# EAGLE board untitled (EAGLE 9.4.2)
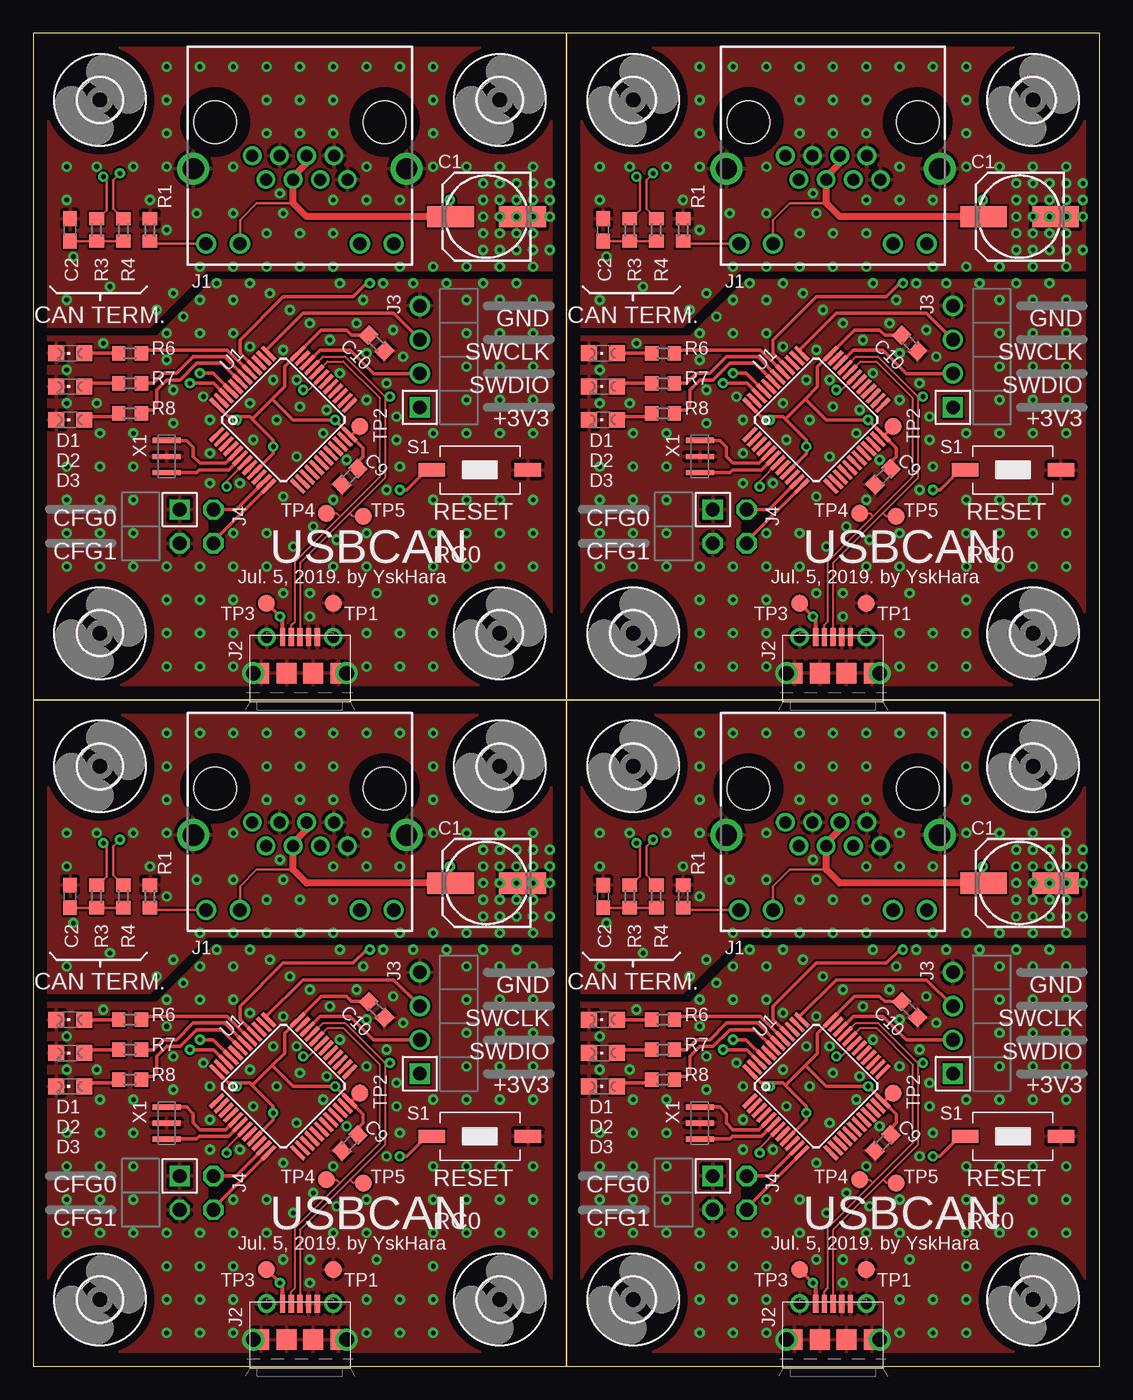
[diagram p0: board, top side]
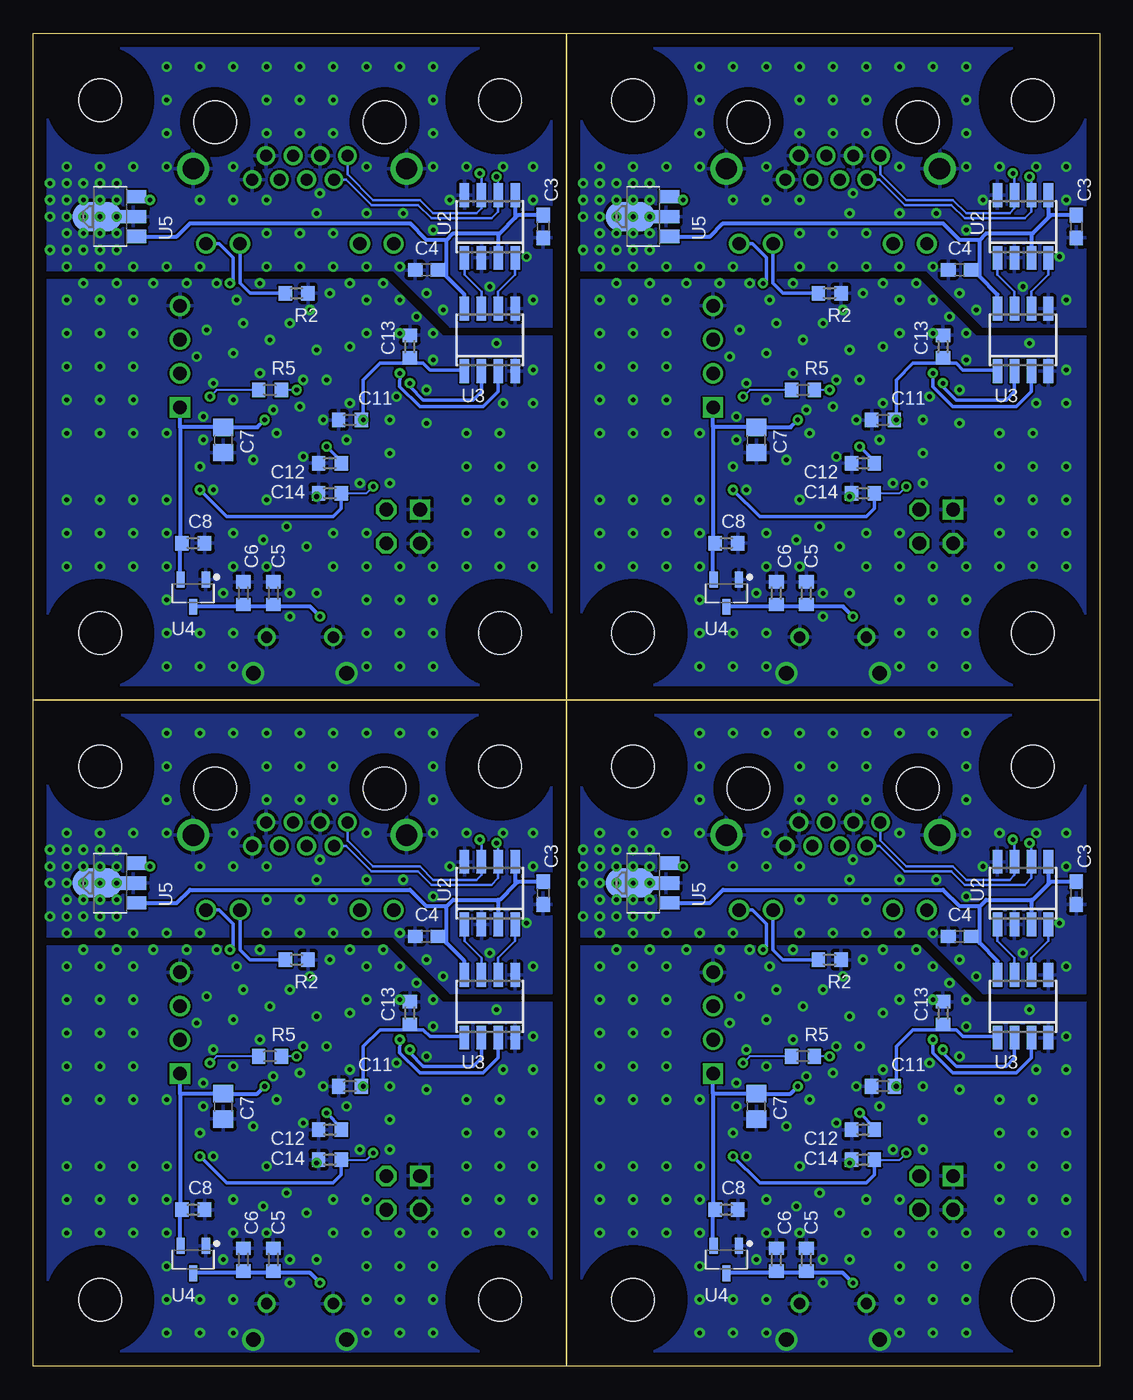
[diagram p1: board, bottom side, seen from below]

Size 80 x 100 mm. Coordinates in mm from the lower left corner, seen from the top.
Outline: 40,0 0,0 0,50
Outline: 40,0 40,50
Outline: 40,50 0,50
Outline: 40,0 80,0 80,50
Outline: 80,50 40,50
Outline: 40,50 40,0
Outline: 0,50 40,50
Outline: 40,50 40,100
Outline: 40,100 0,100 0,50
Outline: 40,50 80,50
Outline: 80,50 80,100 40,100
Outline: 40,100 40,50
Copper layers (1*16): Top 0.035mm / dielectric 1.5mm / Bottom 0.035mm
Design rules "default": minimum track width 6mil, minimum drill 0.35mm, track to track 6mil, track to pad 6mil, pad to pad 6mil, via to via 6mil, smd to smd 6mil, copper to edge 40mil, drill to drill 6mil, minimum pad ring 10mil, minimum via ring 8mil, stop-mask expansion 4mil, vias tented up to drill 0mil, thermal gap 10mil
tKeepout: 48 lines
bKeepout: 48 lines
tRestrict: area 14.2,24.2 to 14.6,24.5; area 54.2,24.2 to 54.6,24.5; area 14.2,74.2 to 14.6,74.5; area 54.2,74.2 to 54.6,74.5; 8 lines
bRestrict: 4 lines

## Footprints (pad centres in the part's own frame; a part is rotated, then mirrored left to right if it is on the bottom)
153CLV-0605 = smd 3.5 x 1.6: + 2.7,0; - -2.7,0
C0603 = smd 1.1 x 1: 1 -0.85,0; 2 0.85,0
C0603' = smd 1 x 1.1: 1 -0.85,0; 2 0.85,0
C0805 = smd 1.3 x 1.5: 1 -0.95,0; 2 0.95,0
CHIPLED_0805 = smd 1.2 x 1.2: A 0,-1.05; C 0,1.05
3,2 = hole 3.2: 0,0
8P8C-LED = drill 0.9 pad 1.3: 1 3.57,-3.81; 2 2.55,-2.03; 3 1.53,-3.81; 4 0.51,-2.03; 5 -0.51,-3.81; 6 -1.53,-2.03; 7 -2.55,-3.81; 8 -3.57,-2.03 | drill 1 pad 1.422: GA 4.5,2.78; GC 7.04,2.78; YA -7.04,2.78; YC -4.5,2.78 | drill 1.6 pad 2.184: M1 -8,-2.85; M2 8,-2.85 | hole 3.2: 6.35,-6.35; -6.35,-6.35
47589-0001 = smd 1.35 x 0.4: 1 2.7,1.3; 2 2.7,0.65; 3 2.7,0; 4 2.7,-0.65; 5 2.7,-1.3 | drill 1.1 pad 1.6: CASING1 0,3.5; CASING2 0,-3.5 | drill 0.85 pad 1.25: CASING3 2.7,2.5; CASING4 2.7,-2.5 | smd 1.55 x 1.2: P$1 0,2.9; P$4 0,-2.9 | smd 1.55 x 1.5: P$2 0,1; P$3 0,-1
MA04-1 = drill 1.016 square: 1 3.81,0 | drill 1.016: 2 1.27,0; 3 -1.27,0; 4 -3.81,0
MA02-2W = drill 1.016 octagon: 1 -1.27,-1.27; 2 -1.27,1.27; 3 1.27,-1.27 | drill 1.016 square: 4 1.27,1.27
R0603 = smd 1 x 1.1: 1 -0.85,0; 2 0.85,0
SWITCH_TACTILE_3X6 = smd 2 x 1: P$1 -3.6,0; P$2 3.6,0
B1,27 = smd 1.27 x 1.27: TP 0,0
LQFP48 = smd 1.4 x 0.3: 1 -4.3,2.75; 2 -4.3,2.25; 3 -4.3,1.75; 4 -4.3,1.25; 5 -4.3,0.75; 6 -4.3,0.25; 7 -4.3,-0.25; 8 -4.3,-0.75; 9 -4.3,-1.25; 10 -4.3,-1.75; 11 -4.3,-2.25; 12 -4.3,-2.75; 25 4.3,-2.75; 26 4.3,-2.25; 27 4.3,-1.75; 28 4.3,-1.25; 29 4.3,-0.75; 30 4.3,-0.25; 31 4.3,0.25; 32 4.3,0.75; 33 4.3,1.25; 34 4.3,1.75; 35 4.3,2.25; 36 4.3,2.75 | smd 0.3 x 1.4: 13 -2.75,-4.3; 14 -2.25,-4.3; 15 -1.75,-4.3; 16 -1.25,-4.3; 17 -0.75,-4.3; 18 -0.25,-4.3; 19 0.25,-4.3; 20 0.75,-4.3; 21 1.25,-4.3; 22 1.75,-4.3; 23 2.25,-4.3; 24 2.75,-4.3; 37 2.75,4.3; 38 2.25,4.3; 39 1.75,4.3; 40 1.25,4.3; 41 0.75,4.3; 42 0.25,4.3; 43 -0.25,4.3; 44 -0.75,4.3; 45 -1.25,4.3; 46 -1.75,4.3; 47 -2.25,4.3; 48 -2.75,4.3
SO08 = smd 0.72 x 1.78: 1 -1.905,-2.35; 2 -0.635,-2.35; 3 0.635,-2.35; 4 1.905,-2.35; 5 1.905,2.35; 6 0.635,2.35; 7 -0.635,2.35; 8 -1.905,2.35
SOT95P240X110-3 = smd 1.18 x 0.609: 1 -1.024,0.95; 2 -1.024,-0.95; 3 1.024,0
SOT89 = smd 1 x 1.5: 1 -1.499,-1.981; 3 1.499,-1.981 | smd 1 x 2: 2 0,-1.727 | smd 2.2 x 3.7: 2@1 0,0.94
CSTCE8M00G55 = smd 0.4 x 2.1: 1 -1.2,0; 2 0,0; 3 1.2,0

## Placement (x,y rotation side)
C1  EEEHA1E220P  [153CLV-0605]  34,36.25 180 top
C2  [C0603]  2.75,35.25 90 top
C3  [C0603]  1.75,35.5 270 bottom
C4  [C0603]  10.5,32.25 180 bottom
C5  1u  [C0603']  22,8 90 bottom
C6  100n  [C0603']  24.25,8 90 bottom
C7  4u7  [C0805]  25.75,19.5 270 bottom
C8  100n  [C0603']  28,11.75 0 bottom
C9  100n  [C0603']  23.75,16.75 45 top
C10  100n  [C0603']  25.75,26.75 135 top
C11  100n  [C0603']  16.25,21 0 bottom
C12  100n  [C0603']  17.75,17.75 0 bottom
C13  100n  [C0603']  11.75,26.5 270 bottom
C14  100n  [C0603']  17.75,15.5 0 bottom
C15  [C0603]  41.75,35.5 270 bottom
C16  EEEHA1E220P  [153CLV-0605]  74,36.25 180 top
C17  [C0603]  50.5,32.25 180 bottom
C18  100n  [C0603']  64.25,8 90 bottom
C19  100n  [C0603']  68,11.75 0 bottom
C20  4u7  [C0805]  65.75,19.5 270 bottom
C21  100n  [C0603']  63.75,16.75 45 top
C22  100n  [C0603']  65.75,26.75 135 top
C23  100n  [C0603']  56.25,21 0 bottom
C24  100n  [C0603']  57.75,15.5 0 bottom
C25  1u  [C0603']  62,8 90 bottom
C26  100n  [C0603']  57.75,17.75 0 bottom
C27  [C0603]  42.75,35.25 90 top
C28  100n  [C0603']  51.75,26.5 270 bottom
C29  [C0603]  1.75,85.5 270 bottom
C30  EEEHA1E220P  [153CLV-0605]  34,86.25 180 top
C31  [C0603]  10.5,82.25 180 bottom
C32  100n  [C0603']  24.25,58 90 bottom
C33  100n  [C0603']  28,61.75 0 bottom
C34  4u7  [C0805]  25.75,69.5 270 bottom
C35  100n  [C0603']  23.75,66.75 45 top
C36  100n  [C0603']  25.75,76.75 135 top
C37  100n  [C0603']  16.25,71 0 bottom
C38  100n  [C0603']  17.75,65.5 0 bottom
C39  1u  [C0603']  22,58 90 bottom
C40  100n  [C0603']  17.75,67.75 0 bottom
C41  [C0603]  2.75,85.25 90 top
C42  100n  [C0603']  11.75,76.5 270 bottom
C43  [C0603]  41.75,85.5 270 bottom
C44  EEEHA1E220P  [153CLV-0605]  74,86.25 180 top
C45  [C0603]  50.5,82.25 180 bottom
C46  100n  [C0603']  64.25,58 90 bottom
C47  100n  [C0603']  68,61.75 0 bottom
C48  4u7  [C0805]  65.75,69.5 270 bottom
C49  100n  [C0603']  63.75,66.75 45 top
C50  100n  [C0603']  65.75,76.75 135 top
C51  100n  [C0603']  56.25,71 0 bottom
C52  100n  [C0603']  57.75,65.5 0 bottom
C53  1u  [C0603']  62,58 90 bottom
C54  100n  [C0603']  57.75,67.75 0 bottom
C55  [C0603]  42.75,85.25 90 top
C56  100n  [C0603']  51.75,76.5 270 bottom
D1  [CHIPLED_0805]  2.75,26 90 top
D2  [CHIPLED_0805]  2.75,23.5 90 top
D3  [CHIPLED_0805]  2.75,21 90 top
D4  [CHIPLED_0805]  42.75,26 90 top
D5  [CHIPLED_0805]  42.75,23.5 90 top
D6  [CHIPLED_0805]  42.75,21 90 top
D7  [CHIPLED_0805]  2.75,76 90 top
D8  [CHIPLED_0805]  2.75,73.5 90 top
D9  [CHIPLED_0805]  2.75,71 90 top
D10  [CHIPLED_0805]  42.75,76 90 top
D11  [CHIPLED_0805]  42.75,73.5 90 top
D12  [CHIPLED_0805]  42.75,71 90 top
H1  MOUNT-HOLE3.2  [3,2]  5,5 0 top
H2  MOUNT-HOLE3.2  [3,2]  35,5 0 top
H3  MOUNT-HOLE3.2  [3,2]  5,45 0 top
H4  MOUNT-HOLE3.2  [3,2]  35,45 0 top
H5  MOUNT-HOLE3.2  [3,2]  75,45 0 top
H6  MOUNT-HOLE3.2  [3,2]  75,5 0 top
H7  MOUNT-HOLE3.2  [3,2]  45,45 0 top
H8  MOUNT-HOLE3.2  [3,2]  45,5 0 top
H9  MOUNT-HOLE3.2  [3,2]  35,95 0 top
H10  MOUNT-HOLE3.2  [3,2]  35,55 0 top
H11  MOUNT-HOLE3.2  [3,2]  5,95 0 top
H12  MOUNT-HOLE3.2  [3,2]  5,55 0 top
H13  MOUNT-HOLE3.2  [3,2]  75,95 0 top
H14  MOUNT-HOLE3.2  [3,2]  75,55 0 top
H15  MOUNT-HOLE3.2  [3,2]  45,95 0 top
H16  MOUNT-HOLE3.2  [3,2]  45,55 0 top
J1  8P8C-LED  [8P8C-LED]  20,37 180 top
J2  MICRO-USB-RECEPTACLE47589-0001  [47589-0001]  20,2 90 top
J3  MA04-1  [MA04-1]  29,25.75 270 top
J4  MA02-2  [MA02-2W]  12.25,13 90 top
J5  8P8C-LED  [8P8C-LED]  60,37 180 top
J6  MICRO-USB-RECEPTACLE47589-0001  [47589-0001]  60,2 90 top
J7  MA02-2  [MA02-2W]  52.25,13 90 top
J8  MA04-1  [MA04-1]  69,25.75 270 top
J9  8P8C-LED  [8P8C-LED]  20,87 180 top
J10  MICRO-USB-RECEPTACLE47589-0001  [47589-0001]  20,52 90 top
J11  MA02-2  [MA02-2W]  12.25,63 90 top
J12  MA04-1  [MA04-1]  29,75.75 270 top
J13  8P8C-LED  [8P8C-LED]  60,87 180 top
J14  MICRO-USB-RECEPTACLE47589-0001  [47589-0001]  60,52 90 top
J15  MA02-2  [MA02-2W]  52.25,63 90 top
J16  MA04-1  [MA04-1]  69,75.75 270 top
R1  [R0603]  8.75,35.25 270 top
R2  [R0603]  20.25,30.5 180 bottom
R3  60  [R0603]  4.75,35.25 270 top
R4  60  [R0603]  6.75,35.25 270 top
R5  1k5  [R0603]  22.25,23.25 180 bottom
R6  1k  [R0603]  7.25,26 180 top
R7  1k  [R0603]  7.25,23.75 180 top
R8  1k  [R0603]  7.25,21.5 180 top
R9  [R0603]  48.75,35.25 270 top
R10  [R0603]  60.25,30.5 180 bottom
R11  60  [R0603]  46.75,35.25 270 top
R12  1k  [R0603]  47.25,26 180 top
R13  1k  [R0603]  47.25,23.75 180 top
R14  1k  [R0603]  47.25,21.5 180 top
R15  60  [R0603]  44.75,35.25 270 top
R16  1k5  [R0603]  62.25,23.25 180 bottom
R17  [R0603]  8.75,85.25 270 top
R18  [R0603]  20.25,80.5 180 bottom
R19  60  [R0603]  6.75,85.25 270 top
R20  1k  [R0603]  7.25,76 180 top
R21  1k  [R0603]  7.25,73.75 180 top
R22  1k  [R0603]  7.25,71.5 180 top
R23  60  [R0603]  4.75,85.25 270 top
R24  1k5  [R0603]  22.25,73.25 180 bottom
R25  [R0603]  48.75,85.25 270 top
R26  [R0603]  60.25,80.5 180 bottom
R27  60  [R0603]  46.75,85.25 270 top
R28  1k  [R0603]  47.25,76 180 top
R29  1k  [R0603]  47.25,73.75 180 top
R30  1k  [R0603]  47.25,71.5 180 top
R31  60  [R0603]  44.75,85.25 270 top
R32  1k5  [R0603]  62.25,73.25 180 bottom
S1  SWITCH_TACTILETOP  [SWITCH_TACTILE_3X6]  33.5,17.25 180 top
S2  SWITCH_TACTILETOP  [SWITCH_TACTILE_3X6]  73.5,17.25 180 top
S3  SWITCH_TACTILETOP  [SWITCH_TACTILE_3X6]  33.5,67.25 180 top
S4  SWITCH_TACTILETOP  [SWITCH_TACTILE_3X6]  73.5,67.25 180 top
TP1  TPB1,27  [B1,27]  22.5,7.25 0 top
TP2  TPB1,27  [B1,27]  24.5,20.5 0 top
TP3  TPB1,27  [B1,27]  17.5,7.25 0 top
TP4  TPB1,27  [B1,27]  22,14 0 top
TP5  TPB1,27  [B1,27]  24.75,13.75 0 top
TP6  TPB1,27  [B1,27]  62.5,7.25 0 top
TP7  TPB1,27  [B1,27]  64.5,20.5 0 top
TP8  TPB1,27  [B1,27]  57.5,7.25 0 top
TP9  TPB1,27  [B1,27]  62,14 0 top
TP10  TPB1,27  [B1,27]  64.75,13.75 0 top
TP11  TPB1,27  [B1,27]  22.5,57.25 0 top
TP12  TPB1,27  [B1,27]  24.5,70.5 0 top
TP13  TPB1,27  [B1,27]  17.5,57.25 0 top
TP14  TPB1,27  [B1,27]  22,64 0 top
TP15  TPB1,27  [B1,27]  24.75,63.75 0 top
TP16  TPB1,27  [B1,27]  62.5,57.25 0 top
TP17  TPB1,27  [B1,27]  64.5,70.5 0 top
TP18  TPB1,27  [B1,27]  57.5,57.25 0 top
TP19  TPB1,27  [B1,27]  62,64 0 top
TP20  TPB1,27  [B1,27]  64.75,63.75 0 top
U1  STM32F302C  [LQFP48]  18.75,21 45 top
U2  NCV7351D1E  [SO08]  5.75,35.5 0 bottom
U3  SI8621AB-B-IS  [SO08]  5.75,27 0 bottom
U4  AP2127N-3.3TRG1  [SOT95P240X110-3]  28,8 270 bottom
U5  78L05F  [SOT89]  34.25,36.25 90 bottom
U6  NCV7351D1E  [SO08]  45.75,35.5 0 bottom
U7  STM32F302C  [LQFP48]  58.75,21 45 top
U8  SI8621AB-B-IS  [SO08]  45.75,27 0 bottom
U9  AP2127N-3.3TRG1  [SOT95P240X110-3]  68,8 270 bottom
U10  78L05F  [SOT89]  74.25,36.25 90 bottom
U11  NCV7351D1E  [SO08]  5.75,85.5 0 bottom
U12  STM32F302C  [LQFP48]  18.75,71 45 top
U13  SI8621AB-B-IS  [SO08]  5.75,77 0 bottom
U14  AP2127N-3.3TRG1  [SOT95P240X110-3]  28,58 270 bottom
U15  78L05F  [SOT89]  34.25,86.25 90 bottom
U16  NCV7351D1E  [SO08]  45.75,85.5 0 bottom
U17  STM32F302C  [LQFP48]  58.75,71 45 top
U18  SI8621AB-B-IS  [SO08]  45.75,77 0 bottom
U19  AP2127N-3.3TRG1  [SOT95P240X110-3]  68,58 270 bottom
U20  78L05F  [SOT89]  74.25,86.25 90 bottom
X1  CSTCE8M00G55  [CSTCE8M00G55]  10,18.25 270 top
X2  CSTCE8M00G55  [CSTCE8M00G55]  50,18.25 270 top
X3  CSTCE8M00G55  [CSTCE8M00G55]  10,68.25 270 top
X4  CSTCE8M00G55  [CSTCE8M00G55]  50,68.25 270 top

## Library data of the parts
C1-C4 C15-C17 C27 C29-C31 C41 C43-C45 C55 = rcl; SPICEPREFIX: C
C5-C14 C18-C26 C28 C32-C40 C42 C46-C54 C56 R5-R8 R12-R14 R16 R20-R22 R24 R28-R30 R32 = rcl
D1-D12 = led
H1-H16 = holes
J1 J5 J9 J13 = con-rj45; OC_FARNELL: unknown; OC_NEWARK: unknown
J2 J6 J10 J14 = con-molex-usb
J3 J4 J7 J8 J11 J12 J15 J16 = con-headers
R1-R4 R9-R11 R15 R17-R19 R23 R25-R27 R31 = rcl; SPICEPREFIX: R
S1-S4 = switch-tactile
TP1-TP20 = testpad
U1 U7 U12 U17 = stm32_mcu
U2 U6 U11 U16 = on-semi
U3 U8 U13 U18 = silabs
U4 U9 U14 U19 = torex
U5 U10 U15 U20 = linear
X1-X4 = resonator

## Nets
!RESET: C14.2 S1.P$2 U1.7
!RESET1: C24.2 S2.P$2 U7.7
!RESET2: C38.2 S3.P$2 U12.7
!RESET3: C52.2 S4.P$2 U17.7
+3V1: C19.1 C20.1 C21.2 C22.2 C23.2 C26.2 C28.2 J8.1 TP7.TP U7.9 U7.24 U7.36 U7.48 U8.1 U9.2
+3V2: C33.1 C34.1 C35.2 C36.2 C37.2 C40.2 C42.2 J12.1 TP12.TP U12.9 U12.24 U12.36 U12.48 U13.1 U14.2
+3V3: C7.1 C8.1 C9.2 C10.2 C11.2 C12.2 C13.2 J3.1 TP2.TP U1.9 U1.24 U1.36 U1.48 U3.1 U4.2
+3V4: C47.1 C48.1 C49.2 C50.2 C51.2 C54.2 C56.2 J16.1 TP17.TP U17.9 U17.24 U17.36 U17.48 U18.1 U19.2
+5V: C5.1 C6.1 J2.1 TP3.TP U4.3
+5V1: C18.1 C25.1 J6.1 TP8.TP U9.3
+5V2: C32.1 C39.1 J10.1 TP13.TP U14.3
+5V3: C46.1 C53.1 J14.1 TP18.TP U19.3
+5V_ISO: C3.1 C4.1 U2.3 U2.5 U3.8 U5.1
+5V_ISO1: C15.1 C17.1 U6.3 U6.5 U8.8 U10.1
+5V_ISO2: C29.1 C31.1 U11.3 U11.5 U13.8 U15.1
+5V_ISO3: C43.1 C45.1 U16.3 U16.5 U18.8 U20.1
+12V: C1.+ J1.4 J1.5 J1.GA U5.3
+12V1: C16.+ J5.4 J5.5 J5.GA U10.3
+12V2: C30.+ J9.4 J9.5 J9.GA U15.3
+12V3: C44.+ J13.4 J13.5 J13.GA U20.3
CAN_LED: J1.YA U1.40
CAN_LED1: J5.YA U7.40
CAN_LED2: J9.YA U12.40
CAN_LED3: J13.YA U17.40
CANH: J1.1 R4.1 U2.7
CANH1: J5.1 R11.1 U6.7
CANH2: J9.1 R19.1 U11.7
CANH3: J13.1 R27.1 U16.7
CANL: J1.2 R3.1 U2.6
CANL1: J5.2 R15.1 U6.6
CANL2: J9.2 R23.1 U11.6
CANL3: J13.2 R31.1 U16.6
CANRX: U1.45 U3.3
CANRX1: U7.45 U8.3
CANRX2: U12.45 U13.3
CANRX3: U17.45 U18.3
CANRX_ISO: U2.4 U3.6
CANRX_ISO1: U6.4 U8.6
CANRX_ISO2: U11.4 U13.6
CANRX_ISO3: U16.4 U18.6
CANTX: U1.46 U3.2
CANTX1: U7.46 U8.2
CANTX2: U12.46 U13.2
CANTX3: U17.46 U18.2
CANTX_ISO: U2.1 U3.7
CANTX_ISO1: U6.1 U8.7
CANTX_ISO2: U11.1 U13.7
CANTX_ISO3: U16.1 U18.7
CONF0: J4.3 U1.11
CONF1: J4.1 U1.12
CONF2: J7.3 U7.11
CONF3: J7.1 U7.12
CONF4: J11.3 U12.11
CONF5: J11.1 U12.12
CONF6: J15.3 U17.11
CONF7: J15.1 U17.12
GNDA: C5.2 C6.2 C7.2 C8.2 C9.1 C10.1 C11.1 C12.1 C13.1 C14.1 D1.C D2.C D3.C J2.4 J2.5 J2.CASING1 J2.CASING2 J2.CASING3 J2.CASING4 J2.P$1 J2.P$2 J2.P$3 J2.P$4 J3.4 J4.2 J4.4 R2.1 S1.P$1 TP1.TP U1.8 U1.23 U1.35 U1.44 U1.47 U3.4 U4.1 X1.2
GNDA1: C18.2 C19.2 C20.2 C21.1 C22.1 C23.1 C24.1 C25.2 C26.1 C28.1 D4.C D5.C D6.C J6.4 J6.5 J6.CASING1 J6.CASING2 J6.CASING3 J6.CASING4 J6.P$1 J6.P$2 J6.P$3 J6.P$4 J7.2 J7.4 J8.4 R10.1 S2.P$1 TP6.TP U7.8 U7.23 U7.35 U7.44 U7.47 U8.4 U9.1 X2.2
GNDA2: C32.2 C33.2 C34.2 C35.1 C36.1 C37.1 C38.1 C39.2 C40.1 C42.1 D7.C D8.C D9.C J10.4 J10.5 J10.CASING1 J10.CASING2 J10.CASING3 J10.CASING4 J10.P$1 J10.P$2 J10.P$3 J10.P$4 J11.2 J11.4 J12.4 R18.1 S3.P$1 TP11.TP U12.8 U12.23 U12.35 U12.44 U12.47 U13.4 U14.1 X3.2
GNDA3: C46.2 C47.2 C48.2 C49.1 C50.1 C51.1 C52.1 C53.2 C54.1 C56.1 D10.C D11.C D12.C J14.4 J14.5 J14.CASING1 J14.CASING2 J14.CASING3 J14.CASING4 J14.P$1 J14.P$2 J14.P$3 J14.P$4 J15.2 J15.4 J16.4 R26.1 S4.P$1 TP16.TP U17.8 U17.23 U17.35 U17.44 U17.47 U18.4 U19.1 X4.2
GNDIO: C1.- C2.2 C3.2 C4.2 J1.3 J1.7 J1.8 J1.M1 J1.M2 R1.1 U2.2 U2.8 U3.5 U5.2 U5.2@1
GNDIO1: C15.2 C16.- C17.2 C27.2 J5.3 J5.7 J5.8 J5.M1 J5.M2 R9.1 U6.2 U6.8 U8.5 U10.2 U10.2@1
GNDIO2: C29.2 C30.- C31.2 C41.2 J9.3 J9.7 J9.8 J9.M1 J9.M2 R17.1 U11.2 U11.8 U13.5 U15.2 U15.2@1
GNDIO3: C43.2 C44.- C45.2 C55.2 J13.3 J13.7 J13.8 J13.M1 J13.M2 R25.1 U16.2 U16.8 U18.5 U20.2 U20.2@1
LED0: R6.1 U1.41
LED1: R7.1 U1.42
LED2: R8.1 U1.43
LED3: R14.1 U7.43
LED4: R12.1 U7.41
LED5: R13.1 U7.42
LED6: R22.1 U12.43
LED7: R20.1 U12.41
LED8: R21.1 U12.42
LED9: R30.1 U17.43
LED10: R28.1 U17.41
LED11: R29.1 U17.42
N$1: J5.GC R9.2
N$2: D2.A R7.2
N$3: J1.GC R1.2
N$4: J1.YC R2.2
N$5: D1.A R6.2
N$6: C2.1 R3.2 R4.2
N$7: U1.6 X1.3
N$8: U1.5 X1.1
N$9: J5.YC R10.2
N$10: U7.6 X2.3
N$11: R5.1 U1.31
N$12: U7.5 X2.1
N$13: R16.1 U7.31
N$14: C27.1 R11.2 R15.2
N$15: D5.A R13.2
N$16: D4.A R12.2
N$17: D6.A R14.2
N$18: J9.GC R17.2
N$19: J9.YC R18.2
N$20: U12.6 X3.3
N$21: D3.A R8.2
N$22: U12.5 X3.1
N$23: R24.1 U12.31
N$24: C41.1 R19.2 R23.2
N$25: D8.A R21.2
N$26: D7.A R20.2
N$27: D9.A R22.2
N$28: J13.GC R25.2
N$29: J13.YC R26.2
N$30: U17.6 X4.3
N$31: U17.5 X4.1
N$32: R32.1 U17.31
N$33: C55.1 R27.2 R31.2
N$34: D11.A R29.2
N$35: D10.A R28.2
N$36: D12.A R30.2
SWCLK: J3.3 U1.37
SWCLK1: J8.3 U7.37
SWCLK2: J12.3 U12.37
SWCLK3: J16.3 U17.37
SWDIO: J3.2 U1.34
SWDIO1: J8.2 U7.34
SWDIO2: J12.2 U12.34
SWDIO3: J16.2 U17.34
USB_DM: J2.2 TP4.TP U1.32
USB_DM1: J6.2 TP9.TP U7.32
USB_DM2: J10.2 TP14.TP U12.32
USB_DM3: J14.2 TP19.TP U17.32
USB_DP: J2.3 R5.2 TP5.TP U1.33
USB_DP1: J6.3 R16.2 TP10.TP U7.33
USB_DP2: J10.3 R24.2 TP15.TP U12.33
USB_DP3: J14.3 R32.2 TP20.TP U17.33

## Tracks (layer width: path | path; a pad name or v marks a point on that pad's centre or on a via)
!RESET  (via drill 0.35)
  Top 0.152: v14.5,16 14.5,16.4 U1.7
  Top 0.254: S1.P$2 29.5,17.25 28,15.75 v27.5,15.75
  Bottom 0.152: C14.2 15,15.5 v14.5,16
  Bottom 0.254: v27.5,15.75 25.5,13.75 17.5,13.75 16.9,14.35 C14.2
!RESET1  (via drill 0.35)
  Top 0.152: v54.5,16 54.5,16.4 U7.7
  Top 0.254: S2.P$2 69.5,17.25 68,15.75 v67.5,15.75
  Bottom 0.152: C24.2 55,15.5 v54.5,16
  Bottom 0.254: v67.5,15.75 65.5,13.75 57.5,13.75 56.9,14.35 C24.2
!RESET2  (via drill 0.35)
  Top 0.152: v14.5,66 14.5,66.4 U12.7
  Top 0.254: S3.P$2 29.5,67.25 28,65.75 v27.5,65.75
  Bottom 0.152: C38.2 15,65.5 v14.5,66
  Bottom 0.254: v27.5,65.75 25.5,63.75 17.5,63.75 16.9,64.35 C38.2
!RESET3  (via drill 0.35)
  Top 0.152: v54.5,66 54.5,66.4 U17.7
  Top 0.254: S4.P$2 69.5,67.25 68,65.75 v67.5,65.75
  Bottom 0.152: C52.2 55,65.5 v54.5,66
  Bottom 0.254: v67.5,65.75 65.5,63.75 57.5,63.75 56.9,64.35 C52.2
+3V1  (via drill 0.35)
  Top 0.152: 63.9,19.9 U7.24
  Top 0.254: C22.2 63.9,27.35 63.5,27.75 61.61,27.75 U7.36 58.85,24.98 58.85,23.48 57.93,22.57 | 57.93,22.57 56.43,21.07 | U7.48 54.61,21.25 55,21.25 | 55.11,21.25 56.25,21.25 56.43,21.07 | 55.11,21.25 55,21.25 | U7.9 58,18.48 v58,19 58,19.5 56.43,21.07 | 57.93,22.57 59.5,21 v62.64,21 U7.24 64.75,18.89 64.75,18.25 64.35,17.85 C21.2 | 55.11,21.25 55.11,21.14 v55.25,21 55,21.25 | TP7.TP 63.9,19.9
  Bottom 0.254: C26.2 56.9,17.9 v58,19 | 51.75,25.25 50.75,25.25 50.25,24.75 47.76,24.75 U8.1 | 51.75,25.25 54,25.25 55.25,24 v55.25,21 | C28.2 51.75,25.25
  Bottom 0.305: v62.64,21 63.19,20.45 C20.1 69,20.45 | 69,20.45 J8.1 | 69,20.45 69,11.75 | U9.2 69,9.02 69,11.75 | C19.1 69,11.75 | C23.2 v55.25,21
+3V2  (via drill 0.35)
  Top 0.152: 23.9,69.9 U12.24
  Top 0.254: C36.2 23.9,77.35 23.5,77.75 21.61,77.75 U12.36 18.85,74.98 18.85,73.48 17.93,72.57 | 17.93,72.57 16.43,71.07 | U12.48 14.61,71.25 15,71.25 | 15.11,71.25 16.25,71.25 16.43,71.07 | 15.11,71.25 15,71.25 | U12.9 18,68.48 v18,69 18,69.5 16.43,71.07 | 17.93,72.57 19.5,71 v22.64,71 U12.24 24.75,68.89 24.75,68.25 24.35,67.85 C35.2 | 15.11,71.25 15.11,71.14 v15.25,71 15,71.25 | TP12.TP 23.9,69.9
  Bottom 0.254: C40.2 16.9,67.9 v18,69 | 11.75,75.25 10.75,75.25 10.25,74.75 7.75,74.75 U13.1 | 11.75,75.25 14,75.25 15.25,74 v15.25,71 | C42.2 11.75,75.25
  Bottom 0.305: v22.64,71 23.19,70.45 C34.1 29,70.45 | 29,70.45 J12.1 | 29,70.45 29,61.75 | U14.2 29,59.02 29,61.75 | C33.1 29,61.75 | C37.2 v15.25,71
+3V3  (via drill 0.35)
  Top 0.152: 23.9,19.9 U1.24
  Top 0.254: C10.2 23.9,27.35 23.5,27.75 21.61,27.75 U1.36 18.85,24.98 18.85,23.48 17.93,22.57 | 17.93,22.57 16.43,21.07 | U1.48 14.61,21.25 15,21.25 | 15.11,21.25 16.25,21.25 16.43,21.07 | 15.11,21.25 15,21.25 | U1.9 18,18.48 v18,19 18,19.5 16.43,21.07 | 17.93,22.57 19.5,21 v22.64,21 U1.24 24.75,18.89 24.75,18.25 24.35,17.85 C9.2 | 15.11,21.25 15.11,21.14 v15.25,21 15,21.25 | TP2.TP 23.9,19.9
  Bottom 0.254: C12.2 16.9,17.9 v18,19 | 11.75,25.25 10.75,25.25 10.25,24.75 7.75,24.75 U3.1 | 11.75,25.25 14,25.25 15.25,24 v15.25,21 | C13.2 11.75,25.25
  Bottom 0.305: v22.64,21 23.19,20.45 C7.1 29,20.45 | 29,20.45 J3.1 | 29,20.45 29,11.75 | U4.2 29,9.02 29,11.75 | C8.1 29,11.75 | C11.2 v15.25,21
+3V4  (via drill 0.35)
  Top 0.152: 63.9,69.9 U17.24
  Top 0.254: C50.2 63.9,77.35 63.5,77.75 61.61,77.75 U17.36 58.85,74.98 58.85,73.48 57.93,72.57 | 57.93,72.57 56.43,71.07 | U17.48 54.61,71.25 55,71.25 | 55.11,71.25 56.25,71.25 56.43,71.07 | 55.11,71.25 55,71.25 | U17.9 58,68.48 v58,69 58,69.5 56.43,71.07 | 57.93,72.57 59.5,71 v62.64,71 U17.24 64.75,68.89 64.75,68.25 64.35,67.85 C49.2 | 55.11,71.25 55.11,71.14 v55.25,71 55,71.25 | TP17.TP 63.9,69.9
  Bottom 0.254: C54.2 56.9,67.9 v58,69 | 51.75,75.25 50.75,75.25 50.25,74.75 47.76,74.75 U18.1 | 51.75,75.25 54,75.25 55.25,74 v55.25,71 | C56.2 51.75,75.25
  Bottom 0.305: v62.64,71 63.19,70.45 C48.1 69,70.45 | 69,70.45 J16.1 | 69,70.45 69,61.75 | U19.2 69,59.02 69,61.75 | C47.1 69,61.75 | C51.2 v55.25,71
+5V  (via drill 0.35)
  Top 0.254: TP3.TP v18.5,6.25
  Top 0.305: J2.1 18.7,6.05 v18.5,6.25
  Bottom 0.305: v18.5,6.25 19.25,7 22,7 | 22,7 24.25,7 | C5.1 22,7 | C6.1 24.25,7 | U4.3 28,7 24.25,7
+5V1  (via drill 0.35)
  Top 0.254: TP8.TP v58.5,6.25
  Top 0.305: J6.1 58.7,6.05 v58.5,6.25
  Bottom 0.305: v58.5,6.25 59.25,7 62,7 | 62,7 64.25,7 | C25.1 62,7 | C18.1 64.25,7 | U9.3 68,7 64.25,7
+5V2  (via drill 0.35)
  Top 0.254: TP13.TP v18.5,56.25
  Top 0.305: J10.1 18.7,56.05 v18.5,56.25
  Bottom 0.305: v18.5,56.25 19.25,57 22,57 | 22,57 24.25,57 | C39.1 22,57 | C32.1 24.25,57 | U14.3 28,57 24.25,57
+5V3  (via drill 0.35)
  Top 0.254: TP18.TP v58.5,56.25
  Top 0.305: J14.1 58.7,56.05 v58.5,56.25
  Bottom 0.305: v58.5,56.25 59.25,57 62,57 | 62,57 64.25,57 | C53.1 62,57 | C46.1 64.25,57 | U19.3 68,57 64.25,57
+5V_ISO
  Bottom 0.305: U2.5 3.85,36.16 | 5.12,35 U2.3 | 3.85,36.16 5,35 5.12,35 | U3.8 7.66,30.41 9,31.75 9,32.25 | 9,34.5 10.5,34.5 11.75,35.75 28.25,35.75 29.25,34.75 U5.1 | 9,32.25 9,34.5 | 9,34.5 8.5,35 5.12,35 | C4.1 9,32.25 | C3.1 3.65,36.35 3.85,36.16
+5V_ISO1
  Bottom 0.305: U6.5 43.84,36.16 | 45.12,35 U6.3 | 43.84,36.16 45,35 45.12,35 | U8.8 47.66,30.41 49,31.75 49,32.25 | 49,34.5 50.5,34.5 51.75,35.75 68.25,35.75 69.25,34.75 U10.1 | 49,32.25 49,34.5 | 49,34.5 48.5,35 45.12,35 | C17.1 49,32.25 | C15.1 43.65,36.35 43.84,36.16
+5V_ISO2
  Bottom 0.305: U11.5 3.85,86.16 | 5.12,85 U11.3 | 3.85,86.16 5,85 5.12,85 | U13.8 7.66,80.41 9,81.75 9,82.25 | 9,84.5 10.5,84.5 11.75,85.75 28.25,85.75 29.25,84.75 U15.1 | 9,82.25 9,84.5 | 9,84.5 8.5,85 5.12,85 | C31.1 9,82.25 | C29.1 3.65,86.35 3.85,86.16
+5V_ISO3
  Bottom 0.305: U16.5 43.84,86.16 | 45.12,85 U16.3 | 43.84,86.16 45,85 45.12,85 | U18.8 47.66,80.41 49,81.75 49,82.25 | 49,84.5 50.5,84.5 51.75,85.75 68.25,85.75 69.25,84.75 U20.1 | 49,82.25 49,84.5 | 49,84.5 48.5,85 45.12,85 | C45.1 49,82.25 | C43.1 43.65,86.35 43.84,86.16
+12V  (via drill 0.35)
  Top 0.2: J1.GA 15.5,36 16.76,37.26 19.49,37.26
  Top 0.305: v31.25,37.5 31.25,36.3 C1.+
  Top 0.508: C1.+ 20.5,36.25 19.49,37.26 J1.4 19.49,39.24 20.51,40.26 J1.5
  Bottom 0.305: U5.3 32.02,37.5 v31.25,37.5
+12V1  (via drill 0.35)
  Top 0.2: J5.GA 55.5,36 56.76,37.26 59.49,37.26
  Top 0.305: v71.25,37.5 71.25,36.3 C16.+
  Top 0.508: C16.+ 60.5,36.25 59.49,37.26 J5.4 59.49,39.24 60.51,40.26 J5.5
  Bottom 0.305: U10.3 72.02,37.5 v71.25,37.5
+12V2  (via drill 0.35)
  Top 0.2: J9.GA 15.5,86 16.76,87.26 19.49,87.26
  Top 0.305: v31.25,87.5 31.25,86.3 C30.+
  Top 0.508: C30.+ 20.5,86.25 19.49,87.26 J9.4 19.49,89.24 20.51,90.26 J9.5
  Bottom 0.305: U15.3 32.02,87.5 v31.25,87.5
+12V3  (via drill 0.35)
  Top 0.2: J13.GA 55.5,86 56.76,87.26 59.49,87.26
  Top 0.305: v71.25,87.5 71.25,86.3 C44.+
  Top 0.508: C44.+ 60.5,86.25 59.49,87.26 J13.4 59.49,89.24 60.51,90.26 J13.5
  Bottom 0.305: U20.3 72.02,87.5 v71.25,87.5
CAN_LED  (via drill 0.35)
  Top 0.254: U1.40 15.5,26.02 15.5,27 18.75,30.25 24,30.25 25,31.25 v25.25,31.25
  Bottom 0.254: J1.YA 26.04,34.22 25,33.18 25,31.5 v25.25,31.25
CAN_LED1  (via drill 0.35)
  Top 0.254: U7.40 55.5,26.02 55.5,27 58.75,30.25 64,30.25 65,31.25 v65.25,31.25
  Bottom 0.254: J5.YA 66.04,34.22 65,33.18 65,31.5 v65.25,31.25
CAN_LED2  (via drill 0.35)
  Top 0.254: U12.40 15.5,76.02 15.5,77 18.75,80.25 24,80.25 25,81.25 v25.25,81.25
  Bottom 0.254: J9.YA 26.04,84.22 25,83.18 25,81.5 v25.25,81.25
CAN_LED3  (via drill 0.35)
  Top 0.254: U17.40 55.5,76.02 55.5,77 58.75,80.25 64,80.25 65,81.25 v65.25,81.25
  Bottom 0.254: J13.YA 66.04,84.22 65,83.18 65,81.5 v65.25,81.25
CANH  (via drill 0.35)
  Top 0.2: v6.5,39.5 6,39 6,36.85 R4.1
  Bottom 0.2: J1.1 16.43,39.43 14.5,37.5 11,37.5 10,36.5 6.75,36.5 6.38,36.87 U2.7 6.38,39.38 v6.5,39.5
CANH1  (via drill 0.35)
  Top 0.2: v46.5,39.5 46,39 46,36.85 R11.1
  Bottom 0.2: J5.1 56.43,39.43 54.5,37.5 51,37.5 50,36.5 46.75,36.5 46.38,36.87 U6.7 46.38,39.38 v46.5,39.5
CANH2  (via drill 0.35)
  Top 0.2: v6.5,89.5 6,89 6,86.85 R19.1
  Bottom 0.2: J9.1 16.43,89.43 14.5,87.5 11,87.5 10,86.5 6.75,86.5 6.38,86.86 U11.7 6.38,89.39 v6.5,89.5
CANH3  (via drill 0.35)
  Top 0.2: v46.5,89.5 46,89 46,86.85 R27.1
  Bottom 0.2: J13.1 56.43,89.43 54.5,87.5 51,87.5 50,86.5 46.75,86.5 46.38,86.86 U16.7 46.38,89.39 v46.5,89.5
CANL  (via drill 0.35)
  Top 0.2: R3.1 4.85,36.1 5.5,36.75 5.5,39 v5.25,39.25
  Bottom 0.2: J1.2 16.53,39.03 14.62,37.12 11.12,37.12 10.12,36.12 5.62,36.12 5.12,36.63 U2.6 5.12,39.12 v5.25,39.25
CANL1  (via drill 0.35)
  Top 0.2: R15.1 44.85,36.1 45.5,36.75 45.5,39 v45.25,39.25
  Bottom 0.2: J5.2 56.53,39.03 54.62,37.12 51.12,37.12 50.12,36.12 45.62,36.12 45.12,36.63 U6.6 45.12,39.12 v45.25,39.25
CANL2  (via drill 0.35)
  Top 0.2: R23.1 4.85,86.1 5.5,86.75 5.5,89 v5.25,89.25
  Bottom 0.2: J9.2 16.53,89.03 14.62,87.12 11.12,87.12 10.12,86.12 5.62,86.12 5.12,86.64 U11.6 5.12,89.11 v5.25,89.25
CANL3  (via drill 0.35)
  Top 0.2: R31.1 44.85,86.1 45.5,86.75 45.5,89 v45.25,89.25
  Bottom 0.2: J13.2 56.53,89.03 54.62,87.12 51.12,87.12 50.12,86.12 45.62,86.12 45.12,86.64 U16.6 45.12,89.11 v45.25,89.25
CANRX  (via drill 0.35)
  Top 0.254: v12.5,24.5 13.48,24.5 U1.45
  Bottom 0.254: U3.3 5.12,23.14 6.25,22 11,22 12.5,23.5 v12.5,24.5
CANRX1  (via drill 0.35)
  Top 0.254: v52.5,24.5 53.48,24.5 U7.45
  Bottom 0.254: U8.3 45.12,23.14 46.25,22 51,22 52.5,23.5 v52.5,24.5
CANRX2  (via drill 0.35)
  Top 0.254: v12.5,74.5 13.48,74.5 U12.45
  Bottom 0.254: U13.3 5.12,73.14 6.25,72 11,72 12.5,73.5 v12.5,74.5
CANRX3  (via drill 0.35)
  Top 0.254: v52.5,74.5 53.48,74.5 U17.45
  Bottom 0.254: U18.3 45.12,73.14 46.25,72 51,72 52.5,73.5 v52.5,74.5
CANRX_ISO
  Bottom 0.2: U2.4 3.85,31.91 5.12,30.64 U3.6
CANRX_ISO1
  Bottom 0.2: U6.4 43.84,31.91 45.12,30.64 U8.6
CANRX_ISO2
  Bottom 0.2: U11.4 3.85,81.91 5.12,80.64 U13.6
CANRX_ISO3
  Bottom 0.2: U16.4 43.84,81.91 45.12,80.64 U18.6
CANTX  (via drill 0.35)
  Top 0.254: v11.75,23.75 13.53,23.75 U1.46
  Bottom 0.254: U3.2 6.38,23.11 7,22.5 10.75,22.5 11.75,23.5 v11.75,23.75
CANTX1  (via drill 0.35)
  Top 0.254: v51.75,23.75 53.52,23.75 U7.46
  Bottom 0.254: U8.2 46.38,23.11 47,22.5 50.75,22.5 51.75,23.5 v51.75,23.75
CANTX2  (via drill 0.35)
  Top 0.254: v11.75,73.75 13.53,73.75 U12.46
  Bottom 0.254: U13.2 6.38,73.11 7,72.5 10.75,72.5 11.75,73.5 v11.75,73.75
CANTX3  (via drill 0.35)
  Top 0.254: v51.75,73.75 53.52,73.75 U17.46
  Bottom 0.254: U18.2 46.38,73.11 47,72.5 50.75,72.5 51.75,73.5 v51.75,73.75
CANTX_ISO
  Bottom 0.2: U3.7 6.38,30.64 7.66,31.91 U2.1
CANTX_ISO1
  Bottom 0.2: U8.7 46.38,30.64 47.66,31.91 U6.1
CANTX_ISO2
  Bottom 0.2: U13.7 6.38,80.64 7.66,81.91 U11.1
CANTX_ISO3
  Bottom 0.2: U18.7 46.38,80.64 47.66,81.91 U16.1
CONF0
  Top 0.254: J4.3 15.2,14.27 U1.11
CONF1
  Top 0.254: J4.1 13.5,11.75 13.5,11.86 U1.12
CONF2
  Top 0.254: J7.3 55.2,14.27 U7.11
CONF3
  Top 0.254: J7.1 53.5,11.75 53.5,11.86 U7.12
CONF4
  Top 0.254: J11.3 15.2,64.27 U12.11
CONF5
  Top 0.254: J11.1 13.5,61.75 13.5,61.86 U12.12
CONF6
  Top 0.254: J15.3 55.2,64.27 U17.11
CONF7
  Top 0.254: J15.1 53.5,61.75 53.5,61.86 U17.12
GNDA  (via drill 0.35)
  other vias: 23,24.5 22.25,27 27.75,25.75 23.5,18 15.5,16.25 10,25.5 12.75,22.75 5,17.5 2.5,17.5 2.5,15 5,15 7.5,20 7.5,17.5 13.25,18.5 7.5,15 15,30 19.25,29.25 20.75,28.25 16.25,26.5 12.5,30 10,27.5 15,12.5 17.5,12.5 25,12.5 22.5,15 18.75,15.25 18.25,21 20,22 13.25,16.25 30,15 32.5,15 35,15 37.5,15 37.5,20 35,20 32.5,20 30,20 27.5,17.5 26.5,23.75 25,22.5 24.75,30 26.25,31.25 32.5,30 32.5,27.5 32.5,25 32.5,22.5 35,22.5 37.5,22.5 37.5,25 35,25 35,27.5 37.5,27.5 37.5,30 35,30 30,12.5 32.5,12.5 35,12.5 37.5,12.5 37.5,10 35,10 32.5,10 30,10 30,7.5 30,5 27.5,5 27.5,2.5 30,2.5 25,2.5 25,5 15,7.5 15,5 15,2.5 12.5,2.5 12.5,5 12.5,7.5 10,7.5 10,5 10,2.5 10,10 12.5,10 15,10 17.5,10 7.5,10 5,10 2.5,10 2.5,12.5 5,12.5 7.5,12.5 24.25,28.25 23,31.25 18.75,26.25 16.25,22.25 18,24 16.5,19.5 10.5,20.75 10.5,23.25 4.75,22.25 2.5,24.75 5.25,26.75 2.5,22.25 13.25,21 26.5,15.75 25,10 22.5,10 22.75,12 20.75,6.25 20.75,8 18.75,8 19.5,11.5 21,13 27.25,19.5 27.25,21.25 22,21.75 21.75,20 19.75,18.25 16.25,31.25 17.75,30.5 13.75,31.25 11.25,28.75 15,27.5 33.75,31.25 36.25,31.25 31,31.25 28.5,31.25 25,26 27,27.75 12.5,27.5 19.75,24 5,20 25.75,8
  pour Bottom (rank 6): 0.25,27.25 0.25,0.25 39.75,0.25 39.75,31.5 13.5,31.5 9.25,27.25
  pour Top (rank 6): 0.25,27.25 0.25,0.25 39.75,0.25 39.75,31.5 13.5,31.5 9.25,27.25
GNDA1  (via drill 0.35)
  other vias: 63,24.5 62.25,27 67.75,25.75 63.5,18 55.5,16.25 50,25.5 52.75,22.75 45,17.5 42.5,17.5 42.5,15 45,15 47.5,20 47.5,17.5 53.25,18.5 47.5,15 55,30 59.25,29.25 60.75,28.25 56.25,26.5 52.5,30 50,27.5 55,12.5 57.5,12.5 65,12.5 62.5,15 58.75,15.25 58.25,21 60,22 53.25,16.25 70,15 72.5,15 75,15 77.5,15 77.5,20 75,20 72.5,20 70,20 67.5,17.5 66.5,23.75 65,22.5 64.75,30 66.25,31.25 72.5,30 72.5,27.5 72.5,25 72.5,22.5 75,22.5 77.5,22.5 77.5,25 75,25 75,27.5 77.5,27.5 77.5,30 75,30 70,12.5 72.5,12.5 75,12.5 77.5,12.5 77.5,10 75,10 72.5,10 70,10 70,7.5 70,5 67.5,5 67.5,2.5 70,2.5 65,2.5 65,5 55,7.5 55,5 55,2.5 52.5,2.5 52.5,5 52.5,7.5 50,7.5 50,5 50,2.5 50,10 52.5,10 55,10 57.5,10 47.5,10 45,10 42.5,10 42.5,12.5 45,12.5 47.5,12.5 64.25,28.25 63,31.25 58.75,26.25 56.25,22.25 58,24 56.5,19.5 50.5,20.75 50.5,23.25 44.75,22.25 42.5,24.75 45.25,26.75 42.5,22.25 53.25,21 66.5,15.75 65,10 62.5,10 62.75,12 60.75,6.25 60.75,8 58.75,8 59.5,11.5 61,13 67.25,19.5 67.25,21.25 62,21.75 61.75,20 59.75,18.25 56.25,31.25 57.75,30.5 53.75,31.25 51.25,28.75 55,27.5 73.75,31.25 76.25,31.25 71,31.25 68.5,31.25 65,26 67,27.75 52.5,27.5 59.75,24 45,20 65.75,8
  pour Bottom (rank 6): 40.25,27.25 40.25,0.25 79.75,0.25 79.75,31.5 53.5,31.5 49.25,27.25
  pour Top (rank 6): 40.25,27.25 40.25,0.25 79.75,0.25 79.75,31.5 53.5,31.5 49.25,27.25
GNDA2  (via drill 0.35)
  other vias: 23,74.5 22.25,77 27.75,75.75 23.5,68 15.5,66.25 10,75.5 12.75,72.75 5,67.5 2.5,67.5 2.5,65 5,65 7.5,70 7.5,67.5 13.25,68.5 7.5,65 15,80 19.25,79.25 20.75,78.25 16.25,76.5 12.5,80 10,77.5 15,62.5 17.5,62.5 25,62.5 22.5,65 18.75,65.25 18.25,71 20,72 13.25,66.25 30,65 32.5,65 35,65 37.5,65 37.5,70 35,70 32.5,70 30,70 27.5,67.5 26.5,73.75 25,72.5 24.75,80 26.25,81.25 32.5,80 32.5,77.5 32.5,75 32.5,72.5 35,72.5 37.5,72.5 37.5,75 35,75 35,77.5 37.5,77.5 37.5,80 35,80 30,62.5 32.5,62.5 35,62.5 37.5,62.5 37.5,60 35,60 32.5,60 30,60 30,57.5 30,55 27.5,55 27.5,52.5 30,52.5 25,52.5 25,55 15,57.5 15,55 15,52.5 12.5,52.5 12.5,55 12.5,57.5 10,57.5 10,55 10,52.5 10,60 12.5,60 15,60 17.5,60 7.5,60 5,60 2.5,60 2.5,62.5 5,62.5 7.5,62.5 24.25,78.25 23,81.25 18.75,76.25 16.25,72.25 18,74 16.5,69.5 10.5,70.75 10.5,73.25 4.75,72.25 2.5,74.75 5.25,76.75 2.5,72.25 13.25,71 26.5,65.75 25,60 22.5,60 22.75,62 20.75,56.25 20.75,58 18.75,58 19.5,61.5 21,63 27.25,69.5 27.25,71.25 22,71.75 21.75,70 19.75,68.25 16.25,81.25 17.75,80.5 13.75,81.25 11.25,78.75 15,77.5 33.75,81.25 36.25,81.25 31,81.25 28.5,81.25 25,76 27,77.75 12.5,77.5 19.75,74 5,70 25.75,58
  pour Bottom (rank 6): 0.25,77.25 0.25,50.25 39.75,50.25 39.75,81.5 13.5,81.5 9.25,77.25
  pour Top (rank 6): 0.25,77.25 0.25,50.25 39.75,50.25 39.75,81.5 13.5,81.5 9.25,77.25
GNDA3  (via drill 0.35)
  other vias: 63,74.5 62.25,77 67.75,75.75 63.5,68 55.5,66.25 50,75.5 52.75,72.75 45,67.5 42.5,67.5 42.5,65 45,65 47.5,70 47.5,67.5 53.25,68.5 47.5,65 55,80 59.25,79.25 60.75,78.25 56.25,76.5 52.5,80 50,77.5 55,62.5 57.5,62.5 65,62.5 62.5,65 58.75,65.25 58.25,71 60,72 53.25,66.25 70,65 72.5,65 75,65 77.5,65 77.5,70 75,70 72.5,70 70,70 67.5,67.5 66.5,73.75 65,72.5 64.75,80 66.25,81.25 72.5,80 72.5,77.5 72.5,75 72.5,72.5 75,72.5 77.5,72.5 77.5,75 75,75 75,77.5 77.5,77.5 77.5,80 75,80 70,62.5 72.5,62.5 75,62.5 77.5,62.5 77.5,60 75,60 72.5,60 70,60 70,57.5 70,55 67.5,55 67.5,52.5 70,52.5 65,52.5 65,55 55,57.5 55,55 55,52.5 52.5,52.5 52.5,55 52.5,57.5 50,57.5 50,55 50,52.5 50,60 52.5,60 55,60 57.5,60 47.5,60 45,60 42.5,60 42.5,62.5 45,62.5 47.5,62.5 64.25,78.25 63,81.25 58.75,76.25 56.25,72.25 58,74 56.5,69.5 50.5,70.75 50.5,73.25 44.75,72.25 42.5,74.75 45.25,76.75 42.5,72.25 53.25,71 66.5,65.75 65,60 62.5,60 62.75,62 60.75,56.25 60.75,58 58.75,58 59.5,61.5 61,63 67.25,69.5 67.25,71.25 62,71.75 61.75,70 59.75,68.25 56.25,81.25 57.75,80.5 53.75,81.25 51.25,78.75 55,77.5 73.75,81.25 76.25,81.25 71,81.25 68.5,81.25 65,76 67,77.75 52.5,77.5 59.75,74 45,70 65.75,58
  pour Bottom (rank 6): 40.25,77.25 40.25,50.25 79.75,50.25 79.75,81.5 53.5,81.5 49.25,77.25
  pour Top (rank 6): 40.25,77.25 40.25,50.25 79.75,50.25 79.75,81.5 53.5,81.5 49.25,77.25
GNDIO  (via drill 0.35)
  other vias: 10,42.5 10,40 7.5,40 2.5,40 4.75,40 2.5,37.5 3,33.25 2.5,30 10.5,30.5 12.5,32.5 15,32.5 17.5,32.5 20,32.5 22.5,32.5 20,35 17.5,35 22.5,35 27.5,32.5 30,32.5 32.5,32.5 35,32.5 37.5,32.5 37.5,40 35,40 32.5,40 30,40 30,42.5 30,45 30,47.5 27.5,47.5 25,47.5 22.5,47.5 22.5,45 22.5,42.5 25,40 25,37.5 27.5,37.5 22.5,37.5 20,42.5 20,45 20,47.5 17.5,47.5 17.5,45 17.5,42.5 15,47.5 12.5,47.5 10,47.5 10,45 15,40 18.75,36.5 15,36.5 12.25,36.5 10,35.25 18.5,38 8.75,37.5 5.75,31 9.25,29.25 33.75,33.75 36.25,33.75 38.75,33.75 37.5,35 37.5,37.5 38.75,38.75 36.25,38.75 35,37.5 33.75,36.25 36.25,36.25 33.75,38.75 33.75,35 36.25,35 35,35 35,36.25 37.5,36.25 38.75,36.25 38.75,37.5 36.25,37.5 37.5,38.75 35,38.75 33.75,37.5 35,33.75 37.5,33.75
  pour Top: 0.25,49.75 0.25,28 8.75,28 13,32.25 39.75,32.25 39.75,49.75
  pour Bottom: 0.25,49.75 0.25,28 8.75,28 13,32.25 39.75,32.25 39.75,49.75
GNDIO1  (via drill 0.35)
  other vias: 50,42.5 50,40 47.5,40 42.5,40 44.75,40 42.5,37.5 43,33.25 42.5,30 50.5,30.5 52.5,32.5 55,32.5 57.5,32.5 60,32.5 62.5,32.5 60,35 57.5,35 62.5,35 67.5,32.5 70,32.5 72.5,32.5 75,32.5 77.5,32.5 77.5,40 75,40 72.5,40 70,40 70,42.5 70,45 70,47.5 67.5,47.5 65,47.5 62.5,47.5 62.5,45 62.5,42.5 65,40 65,37.5 67.5,37.5 62.5,37.5 60,42.5 60,45 60,47.5 57.5,47.5 57.5,45 57.5,42.5 55,47.5 52.5,47.5 50,47.5 50,45 55,40 58.75,36.5 55,36.5 52.25,36.5 50,35.25 58.5,38 48.75,37.5 45.75,31 49.25,29.25 73.75,33.75 76.25,33.75 78.75,33.75 77.5,35 77.5,37.5 78.75,38.75 76.25,38.75 75,37.5 73.75,36.25 76.25,36.25 73.75,38.75 73.75,35 76.25,35 75,35 75,36.25 77.5,36.25 78.75,36.25 78.75,37.5 76.25,37.5 77.5,38.75 75,38.75 73.75,37.5 75,33.75 77.5,33.75
  pour Top: 40.25,49.75 40.25,28 48.75,28 53,32.25 79.75,32.25 79.75,49.75
  pour Bottom: 40.25,49.75 40.25,28 48.75,28 53,32.25 79.75,32.25 79.75,49.75
GNDIO2  (via drill 0.35)
  other vias: 10,92.5 10,90 7.5,90 2.5,90 4.75,90 2.5,87.5 3,83.25 2.5,80 10.5,80.5 12.5,82.5 15,82.5 17.5,82.5 20,82.5 22.5,82.5 20,85 17.5,85 22.5,85 27.5,82.5 30,82.5 32.5,82.5 35,82.5 37.5,82.5 37.5,90 35,90 32.5,90 30,90 30,92.5 30,95 30,97.5 27.5,97.5 25,97.5 22.5,97.5 22.5,95 22.5,92.5 25,90 25,87.5 27.5,87.5 22.5,87.5 20,92.5 20,95 20,97.5 17.5,97.5 17.5,95 17.5,92.5 15,97.5 12.5,97.5 10,97.5 10,95 15,90 18.75,86.5 15,86.5 12.25,86.5 10,85.25 18.5,88 8.75,87.5 5.75,81 9.25,79.25 33.75,83.75 36.25,83.75 38.75,83.75 37.5,85 37.5,87.5 38.75,88.75 36.25,88.75 35,87.5 33.75,86.25 36.25,86.25 33.75,88.75 33.75,85 36.25,85 35,85 35,86.25 37.5,86.25 38.75,86.25 38.75,87.5 36.25,87.5 37.5,88.75 35,88.75 33.75,87.5 35,83.75 37.5,83.75
  pour Top: 0.25,99.75 0.25,78 8.75,78 13,82.25 39.75,82.25 39.75,99.75
  pour Bottom: 0.25,99.75 0.25,78 8.75,78 13,82.25 39.75,82.25 39.75,99.75
GNDIO3  (via drill 0.35)
  other vias: 50,92.5 50,90 47.5,90 42.5,90 44.75,90 42.5,87.5 43,83.25 42.5,80 50.5,80.5 52.5,82.5 55,82.5 57.5,82.5 60,82.5 62.5,82.5 60,85 57.5,85 62.5,85 67.5,82.5 70,82.5 72.5,82.5 75,82.5 77.5,82.5 77.5,90 75,90 72.5,90 70,90 70,92.5 70,95 70,97.5 67.5,97.5 65,97.5 62.5,97.5 62.5,95 62.5,92.5 65,90 65,87.5 67.5,87.5 62.5,87.5 60,92.5 60,95 60,97.5 57.5,97.5 57.5,95 57.5,92.5 55,97.5 52.5,97.5 50,97.5 50,95 55,90 58.75,86.5 55,86.5 52.25,86.5 50,85.25 58.5,88 48.75,87.5 45.75,81 49.25,79.25 73.75,83.75 76.25,83.75 78.75,83.75 77.5,85 77.5,87.5 78.75,88.75 76.25,88.75 75,87.5 73.75,86.25 76.25,86.25 73.75,88.75 73.75,85 76.25,85 75,85 75,86.25 77.5,86.25 78.75,86.25 78.75,87.5 76.25,87.5 77.5,88.75 75,88.75 73.75,87.5 75,83.75 77.5,83.75
  pour Top: 40.25,99.75 40.25,78 48.75,78 53,82.25 79.75,82.25 79.75,99.75
  pour Bottom: 40.25,99.75 40.25,78 48.75,78 53,82.25 79.75,82.25 79.75,99.75
LED0
  Top 0.254: U1.41 14.56,26.25 8.35,26.25 R6.1
LED1
  Top 0.254: U1.42 14.35,25.75 12,25.75 10.75,24.5 9.75,24.5 9,23.75 R7.1
LED2
  Top 0.254: U1.43 14.15,25.25 12.25,25.25 11,24 10,24 9.25,23.25 9.25,22 9,21.75 8.35,21.75 R8.1
LED3
  Top 0.254: U7.43 54.15,25.25 52.25,25.25 51,24 50,24 49.25,23.25 49.25,22 49,21.75 48.35,21.75 R14.1
LED4
  Top 0.254: U7.41 54.56,26.25 48.35,26.25 R12.1
LED5
  Top 0.254: U7.42 54.35,25.75 52,25.75 50.75,24.5 49.75,24.5 49,23.75 R13.1
LED6
  Top 0.254: U12.43 14.15,75.25 12.25,75.25 11,74 10,74 9.25,73.25 9.25,72 9,71.75 8.35,71.75 R22.1
LED7
  Top 0.254: U12.41 14.56,76.25 8.35,76.25 R20.1
LED8
  Top 0.254: U12.42 14.35,75.75 12,75.75 10.75,74.5 9.75,74.5 9,73.75 R21.1
LED9
  Top 0.254: U17.43 54.15,75.25 52.25,75.25 51,74 50,74 49.25,73.25 49.25,72 49,71.75 48.35,71.75 R30.1
LED10
  Top 0.254: U17.41 54.56,76.25 48.35,76.25 R28.1
LED11
  Top 0.254: U17.42 54.35,75.75 52,75.75 50.75,74.5 49.75,74.5 49,73.75 R29.1
N$1
  Top 0.2: J5.GC 48.93,34.22 R9.2
N$2
  Top 0.254: R7.2 4.05,23.75 D2.A
N$3
  Top 0.2: J1.GC 8.93,34.22 R1.2
N$4
  Bottom 0.254: R2.2 23.75,30.5 24.5,31.25 J1.YC
N$5
  Top 0.254: R6.2 D1.A
N$6
  Top 0.2: R4.2 R3.2 C2.1
N$7
  Top 0.254: U1.6 14.65,17.25 12.45,17.25 12.25,17.05 X1.3
N$8
  Top 0.254: U1.5 14.44,17.75 12.5,17.75 12,18.25 12,18.95 11.5,19.45 X1.1
N$9
  Bottom 0.254: R10.2 63.75,30.5 64.5,31.25 J5.YC
N$10
  Top 0.254: U7.6 54.65,17.25 52.45,17.25 52.25,17.05 X2.3
N$11  (via drill 0.35)
  Top 0.152: U1.31 20.65,23.25 v20.25,23.25
  Bottom 0.152: v20.25,23.25 R5.1
N$12
  Top 0.254: U7.5 54.44,17.75 52.5,17.75 52,18.25 52,18.95 51.5,19.45 X2.1
N$13  (via drill 0.35)
  Top 0.152: U7.31 60.65,23.25 v60.25,23.25
  Bottom 0.152: v60.25,23.25 R16.1
N$14
  Top 0.2: R11.2 R15.2 C27.1
N$15
  Top 0.254: R13.2 44.05,23.75 D5.A
N$16
  Top 0.254: R12.2 D4.A
N$17
  Top 0.254: D6.A 44.05,21.25 46.15,21.25 R14.2
N$18
  Top 0.2: J9.GC 8.93,84.22 R17.2
N$19
  Bottom 0.254: R18.2 23.75,80.5 24.5,81.25 J9.YC
N$20
  Top 0.254: U12.6 14.65,67.25 12.45,67.25 12.25,67.05 X3.3
N$21
  Top 0.254: D3.A 4.05,21.25 6.15,21.25 R8.2
N$22
  Top 0.254: U12.5 14.44,67.75 12.5,67.75 12,68.25 12,68.95 11.5,69.45 X3.1
N$23  (via drill 0.35)
  Top 0.152: U12.31 20.65,73.25 v20.25,73.25
  Bottom 0.152: v20.25,73.25 R24.1
N$24
  Top 0.2: R19.2 R23.2 C41.1
N$25
  Top 0.254: R21.2 4.05,73.75 D8.A
N$26
  Top 0.254: R20.2 D7.A
N$27
  Top 0.254: D9.A 4.05,71.25 6.15,71.25 R22.2
N$28
  Top 0.2: J13.GC 48.93,84.22 R25.2
N$29
  Bottom 0.254: R26.2 63.75,80.5 64.5,81.25 J13.YC
N$30
  Top 0.254: U17.6 54.65,67.25 52.45,67.25 52.25,67.05 X4.3
N$31
  Top 0.254: U17.5 54.44,67.75 52.5,67.75 52,68.25 52,68.95 51.5,69.45 X4.1
N$32  (via drill 0.35)
  Top 0.152: U17.31 60.65,73.25 v60.25,73.25
  Bottom 0.152: v60.25,73.25 R32.1
N$33
  Top 0.2: R27.2 R31.2 C55.1
N$34
  Top 0.254: R29.2 44.05,73.75 D11.A
N$35
  Top 0.254: R28.2 D10.A
N$36
  Top 0.254: D12.A 44.05,71.25 46.15,71.25 R30.2
SWCLK
  Top 0.254: 17.45,26.2 | 17.45,26.2 U1.37 | 17.45,26.2 20.25,29 27.02,29 J3.3
SWCLK1
  Top 0.254: 57.45,26.2 | 57.45,26.2 U7.37 | 57.45,26.2 60.25,29 67.02,29 J8.3
SWCLK2
  Top 0.254: 17.45,76.19 | 17.45,76.19 U12.37 | 17.45,76.19 20.25,79 27.02,79 J12.3
SWCLK3
  Top 0.254: 57.45,76.19 | 57.45,76.19 U17.37 | 57.45,76.19 60.25,79 67.02,79 J16.3
SWDIO
  Top 0.254: U1.34 21.52,26.25 23.75,26.25 25.52,24.48 J3.2
SWDIO1
  Top 0.254: U7.34 61.52,26.25 63.75,26.25 65.52,24.48 J8.2
SWDIO2
  Top 0.254: U12.34 21.52,76.25 23.75,76.25 25.52,74.48 J12.2
SWDIO3
  Top 0.254: U17.34 61.52,76.25 63.75,76.25 65.52,74.48 J16.2
USB_DM
  Top 0.152: U1.32 22.06,25.38 23.25,25.38 26,22.62 26,16.75 23,13.75 | J2.2 19.35,5.6 19.62,5.88 19.62,10.38 23,13.75 | TP4.TP 22.75,14 23,13.75
USB_DM1
  Top 0.152: U7.32 62.06,25.38 63.25,25.38 66,22.62 66,16.75 63,13.75 | J6.2 59.35,5.6 59.62,5.88 59.62,10.38 63,13.75 | TP9.TP 62.75,14 63,13.75
USB_DM2
  Top 0.152: U12.32 22.06,75.38 23.25,75.38 26,72.62 26,66.75 23,63.75 | J10.2 19.35,55.6 19.62,55.88 19.62,60.38 23,63.75 | TP14.TP 22.75,64 23,63.75
USB_DM3
  Top 0.152: U17.32 62.06,75.38 63.25,75.38 66,72.62 66,66.75 63,63.75 | J14.2 59.35,55.6 59.62,55.88 59.62,60.38 63,63.75 | TP19.TP 62.75,64 63,63.75
USB_DP  (via drill 0.35)
  Top 0.152: U1.33 21.73,25.75 23.38,25.75 26.38,22.75 | 26.38,22.75 26.38,16.62 23.75,14 | 23.75,14 20,10.25 J2.3 | 26.38,22.75 v26.75,22.75 | TP5.TP 24,13.75 23.75,14
  Bottom 0.152: R5.2 26.25,23.25 v26.75,22.75
USB_DP1  (via drill 0.35)
  Top 0.152: U7.33 61.73,25.75 63.38,25.75 66.38,22.75 | 66.38,22.75 66.38,16.62 63.75,14 | 63.75,14 60,10.25 J6.3 | 66.38,22.75 v66.75,22.75 | TP10.TP 64,13.75 63.75,14
  Bottom 0.152: R16.2 66.25,23.25 v66.75,22.75
USB_DP2  (via drill 0.35)
  Top 0.152: U12.33 21.73,75.75 23.38,75.75 26.38,72.75 | 26.38,72.75 26.38,66.62 23.75,64 | 23.75,64 20,60.25 J10.3 | 26.38,72.75 v26.75,72.75 | TP15.TP 24,63.75 23.75,64
  Bottom 0.152: R24.2 26.25,73.25 v26.75,72.75
USB_DP3  (via drill 0.35)
  Top 0.152: U17.33 61.73,75.75 63.38,75.75 66.38,72.75 | 66.38,72.75 66.38,66.62 63.75,64 | 63.75,64 60,60.25 J14.3 | 66.38,72.75 v66.75,72.75 | TP20.TP 64,63.75 63.75,64
  Bottom 0.152: R32.2 66.25,73.25 v66.75,72.75

## Text on the board
tPlace: CAN TERM. | CAN TERM. | GND | GND | SWCLK | SWCLK | SWDIO | SWDIO | +3V3 | +3V3 | RESET | RESET | CFG0 | CFG0 | CFG1 | USBCAN | RC0 | Jul. 5, 2019. by YskHara | CFG1 | USBCAN | RC0 | Jul. 5, 2019. by YskHara | CAN TERM. | CAN TERM. | GND | GND | SWCLK | SWCLK | SWDIO | SWDIO | +3V3 | +3V3 | RESET | RESET | CFG0 | CFG0 | CFG1 | USBCAN | RC0 | Jul. 5, 2019. by YskHara | CFG1 | USBCAN | RC0 | Jul. 5, 2019. by YskHara
_tNames: C1 | C1 | R1 | R1 | J1 | J1 | C2 | R3 | R4 | C2 | R3 | R4 | J3 | J3 | R6 | R6 | U1 | C10 | U1 | C10 | R7 | R7 | TP2 | TP2 | R8 | R8 | D1 | S1 | D1 | S1 | D2 | X1 | C9 | D2 | X1 | C9 | D3 | D3 | J4 | TP4 | TP5 | J4 | TP4 | TP5 | TP3 | TP1 | TP3 | TP1 | J2 | J2 | C1 | C1 | R1 | R1 | J1 | J1 | C2 | R3 | R4 | C2 | R3 | R4 | J3 | J3 | R6 | R6 | U1 | C10 | U1 | C10 | R7 | R7 | TP2 | TP2 | R8 | R8 | D1 | S1 | D1 | S1 | D2 | X1 | C9 | D2 | X1 | C9 | D3 | D3 | J4 | TP4 | TP5 | J4 | TP4 | TP5 | TP3 | TP1 | TP3 | TP1 | J2 | J2
_bNames: C3 | C3 | U5 | U5 | U2 | U2 | C4 | C4 | R2 | R2 | C13 | C13 | R5 | R5 | U3 | U3 | C11 | C11 | C7 | C7 | C12 | C12 | C14 | C14 | C8 | C8 | C5 | C6 | C5 | C6 | U4 | U4 | C3 | C3 | U5 | U5 | U2 | U2 | C4 | C4 | R2 | R2 | C13 | C13 | R5 | R5 | U3 | U3 | C11 | C11 | C7 | C7 | C12 | C12 | C14 | C14 | C8 | C8 | C5 | C6 | C5 | C6 | U4 | U4